# Altium PCB PCB1.PcbDoc (part 2 of 3)
Units mil, origin at the board's own origin, x right, y up, seen from the top; angles counter-clockwise.
Board outline 3898.53 x 2644.2 mil, 4 copper layers (Top Layer, Layer 1, Layer 2, Bottom Layer), stack 64.602 mil thick; 147 components, 160 nets, 823 pads, 446 vias.
Unrouted connection lines stored in the file: 1.
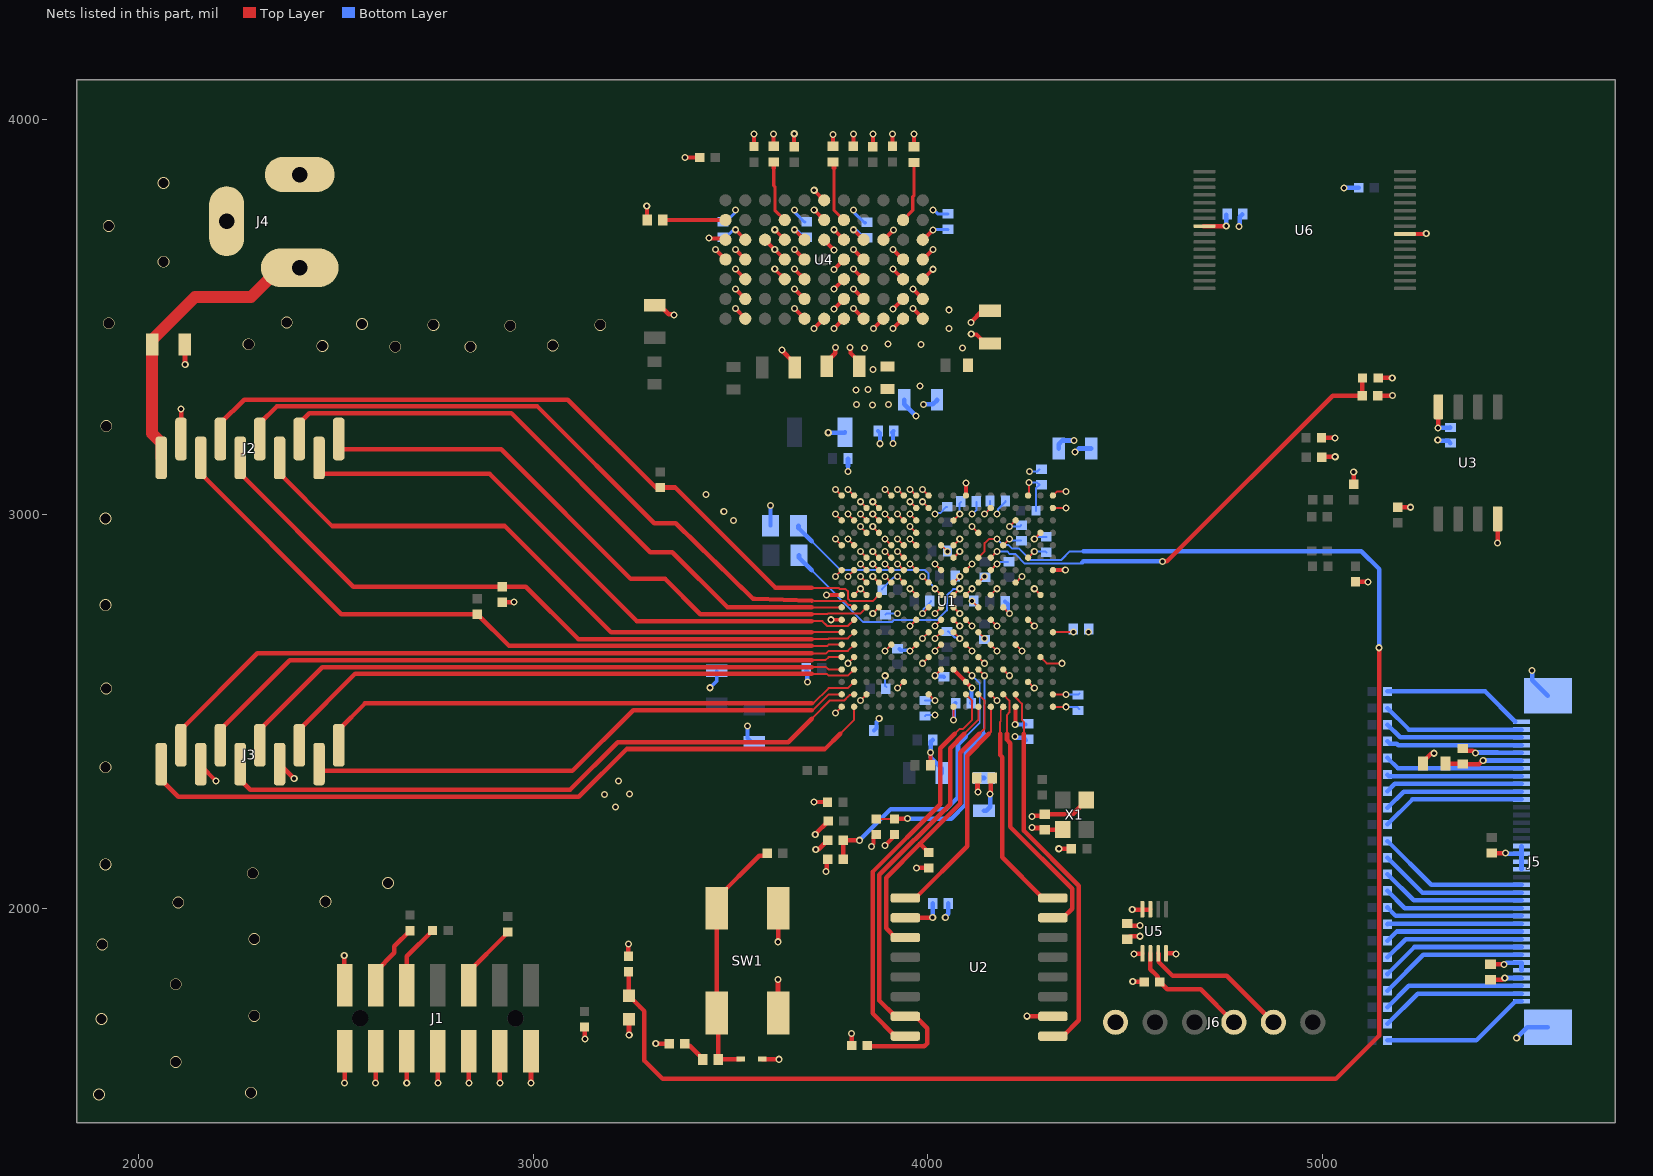
[diagram p4: the nets of this part, all layers, seen from the top]

## Via types
v1: diameter 18/10/10/18 (per signal layer), hole 10, Top Layer to Bottom Layer, tented top, 241 vias
v2: diameter 18/10/10/18 (per signal layer), hole 10, Top Layer to Bottom Layer, 173 vias
v3: diameter 30, hole 26, Top Layer to Bottom Layer, 32 vias

## Nets (pads, with @x,y where several pads share a name; then routed paths per layer and width w, separated by ;. In a path a pad name is that pad's centre, name@x,y a point inside that pad or via, vN(x,y) a via of type N, cw(c..) or ccw(c..) an arc to the next point about the centre after c; other vN are vias at no path point) (continued)
+3V1Reg: C22.2 R62.2 U4.J1 U4.K1 U4.K2 | length 164.6
  Top Layer w10: v1@3861.79,3470.97 U4.J1@3887.04,3496.21 ; v1@3911.79,3470.97 U4.K1@3937.04,3496.21 ; v1@3911.79,3520.97 U4.K2@3937.04,3546.21 ; v2(4109.96,3457.28) 4111.49,3455.75 4123.2,3455.75 4145.7,3433.25 C22.2@4157.51,3433.25
  other v1: 3861.68,3470.97 3911.68,3470.97 3911.68,3520.97
  other v2: 4087.39,3422.25 3982.29,3430.81 3899.39,3431.98 4053.91,3470.9 4053.13,3518.78
+3V3: C1.1 C2.1 C3.1 C6.1 C24.1 C31.1 C32.1 C33.1 C34.1 C35.1 C36.1 C37.1 C49.1 C50.1 C51.1 C52.1 C53.1 C54.1 C55.1 C60.1 C61.1 J1.2 J5.32 J5.33 R1.1 R2.1 R3.1 R4.1 R5.1 R6.1 R7.1 R8.1 R9.1 R13.2 R16.1 R21.1 R22.1 R23.1 R57.1 R61.1 R63.1 U1.A16 U1.B13 U1.C10 U1.D17 U1.E10 U1.E14 U1.G18 U1.H15 U1.L16 U1.P17 U1.R10 U1.R14 U1.T11 U1.U8 U1.U18 U1.V15 U2.2 U3.8 U5.7 U5.8 U6.8 X1.4 | length 2181.1
  Top Layer w5: U1.U8@4001.98,2544.01 v1(4017.73,2528.27) ; U1.E10@4064.98,2921.97 v1(4080.73,2937.71) ; U1.C10@4064.98,2984.96 v1(4080.73,3000.71) ; v1(4143.72,3000.71) U1.B13@4159.47,3016.45 ; U1.R14@4190.96,2607.01 v1(4206.71,2591.26) ; U1.E14@4190.96,2921.97 v1(4206.71,2937.71) ; v1(4221.35,2467.74) v1@4222.46,2468.85 ; U1.H15@4222.46,2827.48 v1(4238.21,2843.23) ; U1.L16@4253.95,2732.99 v1(4269.7,2717.24) ; U1.A16@4253.95,3047.95 4256.59,3050.59 v1(4256.59,3081.33) ; v1(4269.7,2937.71) U1.D17@4285.45,2953.46 ; U1.P17@4285.45,2638.5 4301.2,2622.75 v1(4340.37,2622.75) ; U1.U18@4316.95,2544.01 v1(4350.02,2544.01)
  Top Layer w10: v2(3711.64,2271.3) 3712.18,2270.76 3745.16,2270.76 R5.1@3745.7,2270.22 ; v2(3891.37,2160.65) 3915.2,2184.47 R21.1@3915.2,2188.74 ; U1.R10@4064.98,2607.01 U1.T11@4096.47,2575.51 v1(4112.22,2559.76) ; v1@4222.46,2468.85 U1.V15@4222.46,2512.52 ; U1.G18@4316.95,2858.98 v1(4348.3,2858.99)
  Top Layer w11.55: v2(2520.7,1882.08) 2520.7,1807.7 J1.2@2521.61,1806.79 ; R4.1@3240.99,1880.53 v2(3241.04,1911.4) v2(3241.04,1911.4) ; v2(3714.5,2189.21) 3714.5,2189.92 R6.1@3747.39,2222.82 ; v2(3742.13,2095.09) 3743.22,2096.17 3743.22,2123.23 R22.1@3745.83,2125.84 ; v2(3806.63,1684.71) 3806.79,1684.55 3806.79,1654.03 R3.1@3806.95,1653.88 ; U2.2@3942.95,1977.77 3943.22,1978.04 4012.01,1978.04 v2(4012.28,1978.31) ; v2@3971.6,2104.26 4001.47,2104.26 R2.1@4001.92,2103.81 ; C36.1@4123.81,2332.12 4125.71,2330.23 4125.71,2297.73 v2(4126.79,2296.64) ; v2(4263.64,2206.43) 4264.73,2205.34 4291.8,2205.34 C24.1@4296.22,2200.91 4341.54,2200.91 X1.4@4341.83,2201.2 ; v2(4331.82,2152.66) 4332.03,2152.86 4363.53,2152.86 R57.1@4363.74,2153.07 ; C60.1@4505.41,1963.02 4511.05,1957.38 4536.4,1957.38 v2(4537.54,1958.52) ; v2(4518.04,1998.26) 4562.85,1998.26 U5.7@4563.86,1999.27 ; U6.8@4698.6,3730.7 4698.7,3730.81 4756.24,3730.81 v2(4756.34,3730.91) ; R16.1@4998.32,3145.36 4998.79,3145.83 5031.98,3145.83 v2(5032.46,3146.31) ; v2(5079.35,3107.68) 5079.35,3077.01 R9.1@5079.67,3076.69 ; R8.1@5083.98,2829.37 5084.44,2828.92 5115.14,2828.92 v2(5115.6,2828.46) ; R23.1@5141.19,3346.04 5176.81,3346.04 v2(5176.99,3345.87) ; R7.1@5190.65,3018.51 5190.75,3018.41 5223.37,3018.41 v2(5223.47,3018.32) ; R63.1@5255.08,2368.3 5255.08,2373.22 5276.64,2394.78 v2(5282.91,2394.78) ; v2(5293.22,3219.41) 5293.66,3219.86 5293.66,3272.2 U3.8@5294.11,3272.65 ; C6.1@5425.84,1860.27 5426.26,1859.85 5459.53,1859.85 v2(5459.95,1859.43)
  Bottom Layer w5: C55.1@3992.8,2528.52 3993.06,2528.27 v1(4017.73,2528.27) ; v1(4080.73,3000.71) 4080.73,3028.25 C50.1@4084.21,3031.73 ; v1(4143.72,3000.71) 4157.35,3014.34 C32.1@4157.35,3033.99 ; v1(4206.71,2937.71) 4210.23,2937.71 4214.53,2933.41 C51.1@4236.46,2933.41 ; C37.1@4247.88,2467.74 C37.1@4248.24,2467.38 ; v1(4256.59,3081.33) 4276.43,3081.33 4282.9,3074.86 4273.94,3065.9 R13.2@4273.94,3009.01 ; v1(4269.7,2937.71) 4273.22,2937.71 4278.68,2943.18 C49.1@4300.1,2943.18 ; v1(4350.02,2544.01) 4382.39,2544.01 C54.1@4384.23,2545.86
  Bottom Layer w10: C61.1@3873.81,3211.32 3878.68,3206.46 v2(3878.68,3179.31) ; C52.1@4109.68,2521.61 4110.95,2522.88 4110.95,2558.49 v1(4112.22,2559.76) ; v1(4221.35,2467.74) C37.1@4247.88,2467.74
  Bottom Layer w11.55: v2(4012.28,1978.31) 4012.41,1978.44 4012.41,2013.74 C3.1@4012.55,2013.88 ; v2(4126.79,2296.64) 4126.79,2322.43 4136.38,2332.01 C35.1@4142.26,2332.01 ; C31.1@4331.42,3167.16 4331.42,3177.9 4341,3187.48 v2(4370.19,3187.48) ; v2@4756.65,3731.22 C1.1@4756.65,3747.52 ; C1.1@4756.65,3760.04 C1.1@4756.65,3747.52 ; C1.1@4756.96,3747.83 C1.1@4756.65,3747.52 ; v2(5054.59,3827.37) 5055.35,3828.13 R1.1@5092.14,3828.13 ; v2(5293.22,3219.41) 5293.7,3219.9 5324.03,3219.9 C2.1@5324.51,3220.38 ; v2(5459.95,1859.43) 5461.48,1859.43 5466.04,1863.99 5504.4,1863.99 J5.32@5504.66,1864.25 J5.33@5504.66,1844.57
  Bottom Layer w12: v2(3988.56,3279.16) 4012.41,3279.16 4023.16,3289.91 C34.1@4023.16,3290.91
  other v2: 3971.59,2104.25 4407.14,2702.57 3859.95,3277.02 3818.97,3278.33 3900.66,3278.33 3817.92,3315.89 3848.65,3316.42 3980.25,3325.61
+3V3Reg: C19.2 R61.2 U4.F1 U4.G1 U4.G2 | length 164.7
  Top Layer w10: v1@3711.79,3470.97 U4.F1@3737.04,3496.21 ; v1@3761.79,3470.97 U4.G1@3787.04,3496.21 ; v1@3761.79,3520.97 U4.G2@3787.04,3546.21 ; v2(3802.57,3423.41) 3804.1,3421.88 3804.1,3409.75 3826.35,3387.5 C19.2@3826.35,3375.69
  other v1: 3711.68,3470.97 3761.68,3470.97 3761.68,3520.97
  other v2: 3860.83,3366.97 3839.16,3421.48
+5: C12.1 C15.1 C18.1 C21.1 C59.1 J2.1 J4.1 R33.1 R34.1 U4.B3 U4.B4 U4.B5 U4.E3 U4.E4 U4.E5 U4.F6 U4.H3 U4.H4 U4.H5 U4.L3 U4.L4 U4.L5 | length 1433.9
  Top Layer w10: v1@3511.91,3621.58 U4.B3@3537.16,3596.33 ; v1@3511.91,3671.58 U4.B4@3537.16,3646.33 ; v1(3511.91,3721.69) 3511.91,3721.58 3537.16,3696.33 U4.B5@3537.16,3696.21 ; R34.1@3559.31,3932.5 3559.35,3932.54 3559.35,3964.05 v2(3559.4,3964.09) ; v1@3661.91,3621.58 U4.E3@3687.16,3596.33 ; v1@3661.91,3671.58 U4.E4@3687.16,3646.33 ; v1@3661.91,3721.58 U4.E5@3687.16,3696.33 ; v1@3711.91,3771.58 U4.F6@3737.16,3746.33 ; v1@3811.91,3621.58 U4.H3@3837.16,3596.33 ; v1@3811.91,3671.58 U4.H4@3837.16,3646.33 ; v1@3811.91,3721.58 U4.H5@3837.16,3696.33 ; R33.1@3910.49,3932.91 3910.57,3932.99 3910.57,3964.71 v2(3910.66,3964.8) ; U4.L3@3987.28,3596.21 v1@4012.52,3621.46 ; U4.L4@3987.28,3646.21 v1@4012.52,3671.46 ; U4.L5@3987.28,3696.21 v1@4012.52,3721.46
  Top Layer w30: J2.1@2056.78,3143.25 2056.78,3181.75 2033.7,3204.82 C59.1@2033.7,3430.51 2033.7,3442.32 2142.75,3551.37 2284.68,3551.37 2358.61,3625.3 J4.1@2407.83,3625.3
  Bottom Layer w8: C12.1@3485.11,3701.29 3487.08,3701.29 3505.57,3719.78 3510,3719.78 v1(3511.91,3721.69) ; v1(3661.91,3721.69) 3663.82,3719.78 3668.96,3719.78 3686.86,3701.89 C15.1@3688.83,3701.89 ; v1(3811.91,3721.69) 3813.82,3719.78 3819.7,3719.78 3839.4,3700.09 C18.1@3841.37,3700.09 ; v1(4012.64,3721.46) 4013.19,3722.01 4050.25,3722.01 C21.1@4050.81,3722.57
  other v1: 4012.64,3621.46 3511.91,3621.69 3661.91,3621.69 3811.91,3621.69 4012.64,3671.46 3511.91,3671.69 3661.91,3671.69 3811.91,3671.69 3711.91,3771.69
B_UART0_RX: J6.4 R68.1 U5.2 | length 312.3
  Top Layer w11.55: U5.2@4563.86,1887.27 4563.86,1847.37 4579.55,1831.68 4579.55,1831.53 4582.41,1828.66 4582.41,1820.41 4606.58,1796.24 4691.51,1796.24 4774.81,1712.95 J6.4@4775.62,1712.95
B_UART0_TX: J6.5 U5.3 | length 375.9
  Top Layer w11.55: U5.3@4583.86,1887.27 4585.02,1886.11 4585.02,1865.78 4620.19,1830.61 4757.95,1830.61 J6.5@4875.62,1712.95
BOLO_D0: J3.1 U1.V2 | length 1927.3
  Top Layer w5: 3777.46,2443.9 3813.01,2479.45 U1.V2@3813.01,2512.52
  Top Layer w11.55: J3.1@2056.78,2367.1 2056.78,2327.6 2099.77,2284.61 3115.41,2284.61 3236.35,2405.55 3739.11,2405.55 3777.46,2443.9
BOLO_D1: J3.2 U1.N2 | length 1835
  Top Layer w5: 3705.7,2647.84 3742.04,2647.84 3748.44,2654.25 3797.26,2654.25 U1.N2@3813.01,2670
  Top Layer w11.55: J3.2@2106.78,2415.1 2106.78,2454.6 2300.02,2647.84 3705.7,2647.84
BOLO_D2: J3.4 U1.P1 | length 1690.4
  Top Layer w5: 3705.7,2630.51 3740.45,2630.51 3748.44,2638.5 U1.P1@3781.51,2638.5
  Top Layer w11.55: J3.4@2206.78,2415.1 2206.78,2454.6 2382.68,2630.51 3705.7,2630.51
BOLO_D3: J3.5 U1.U2 | length 1706.6
  Top Layer w5: 3705.7,2482.5 3751.64,2528.44 3788.09,2528.44 3798.41,2538.76 3801.53,2541.88 3810.88,2541.88 U1.U2@3813.01,2544.01
  Top Layer w11.55: J3.5@2256.78,2367.1 2256.78,2327.6 2282.44,2301.94 3093.01,2301.94 3213.95,2422.88 3646.08,2422.88 3705.7,2482.5
BOLO_D4: J3.6 U1.R1 | length 1582.5
  Top Layer w5: 3705.7,2613.18 3742.27,2613.18 3748.44,2607.01 U1.R1@3781.51,2607.01
  Top Layer w11.55: J3.6@2306.78,2415.1 2306.78,2454.6 2465.35,2613.18 3705.7,2613.18
BOLO_D5: J3.8 U1.R2 | length 1512.7
  Top Layer w5: 3705.7,2595.85 3743.85,2595.85 3748.44,2591.26 3797.26,2591.26 U1.R2@3813.01,2607.01
  Top Layer w11.55: J3.8@2406.78,2415.1 2406.78,2454.6 2548.02,2595.85 3705.7,2595.85
BOLO_D6: J3.9 U1.U1 | length 1417.5
  Top Layer w5: 3705.7,2503.67 3708.1,2503.67 3748.44,2544.01 U1.U1@3781.51,2544.01
  Top Layer w11.55: J3.9@2456.78,2367.1 2456.78,2358.19 2465.03,2349.94 3099.08,2349.94 3252.81,2503.67 3705.7,2503.67
BOLO_D7: J3.10 U1.T2 | length 1395.8
  Top Layer w5: 3705.7,2521 3709.68,2521 3748.44,2559.76 3797.26,2559.76 U1.T2@3813.01,2575.51
  Top Layer w11.55: J3.10@2506.78,2415.1 2506.78,2454.6 2573.18,2521 3705.7,2521
BOLO_LSYNC: J2.6 U1.K2 | length 1770.4
  Top Layer w5: 3705.7,2781.82 3713.14,2780.14 3715.54,2780.14 3746.86,2780.14 3789.65,2780.14 3792,2777.79 3799.38,2770.41 3804.07,2770.41 3809.99,2764.49 U1.K2@3813.01,2764.49
  Top Layer w11.55: J2.6@2306.78,3191.25 2306.78,3230.75 2349.78,3273.74 3010.42,3273.74 3306.73,2977.43 3360.84,2977.43 3556.42,2787 3561.18,2786.83 3705.7,2781.82
BOLO_MCLK: J2.10 U1.K3 | length 1539.1
  Top Layer w5: 3705.7,2747.15 3744.95,2747.15 3746.7,2748.9 3828.92,2748.9 U1.K3@3844.5,2764.49
  Top Layer w11.55: J2.10@2506.78,3191.25 2506.78,3173.72 2515.03,3165.47 2918.18,3165.47 3247.14,2836.51 3334.03,2836.51 3423.39,2747.15 3705.7,2747.15
BOLO_PCLK: J2.8 U1.K1 | length 1628.6
  Top Layer w5: 3705.7,2764.49 3748.44,2764.49 U1.K1@3781.51,2764.49
  Top Layer w11.55: J2.8@2406.78,3191.25 2406.78,3230.75 2432.44,3256.41 2944.49,3256.41 3296.42,2904.48 3352.15,2904.48 3492.14,2764.49 3705.7,2764.49
BOLO_RESET: J2.5 R66.1 U1.M2 | length 1776.7
  Top Layer w5: 3705.7,2684.16 3746.86,2684.16 3748.44,2685.75 3797.26,2685.75 U1.M2@3813.01,2701.49
  Top Layer w11.55: J2.5@2256.78,3143.25 2256.78,3103.75 2543.41,2817.11 R66.1@2920.89,2817.11 2981.07,2817.11 3114.01,2684.16 3705.7,2684.16
BOLO_SCL: J2.4 R64.2 U1.J4 | length 1962.6
  Top Layer w5: 3705.7,2813.88 3774.22,2813.88 3776.47,2811.63 3790.93,2811.63 3797.08,2805.48 3797.08,2786.85 3797.82,2786.11 3803.52,2780.41 3860.43,2780.41 U1.J4@3876,2795.98
  Top Layer w11.55: J2.4@2206.78,3191.25 2206.78,3230.75 2267.11,3291.08 3087.33,3291.08 3310.1,3068.31 R64.2@3321.91,3068.31 3359.21,3068.31 3613.64,2813.88 3705.7,2813.88
BOLO_SDA: J2.3 R65.2 U1.N1 | length 1846.5
  Top Layer w5: 3705.7,2666.83 3745.27,2666.83 3748.44,2670 U1.N1@3781.51,2670
  Top Layer w11.55: J2.3@2156.78,3143.25 2156.78,3103.75 2513.37,2747.15 R65.2@2858.01,2747.15 2938.34,2666.83 3705.7,2666.83
BOLO_TRIG: J2.9 U1.L2 | length 1558.2
  Top Layer w5: 3705.7,2729.82 3732.75,2729.82 3745.33,2717.24 3797.26,2717.24 U1.L2@3813.01,2732.99
  Top Layer w11.55: J2.9@2456.78,3143.25 2456.78,3110.91 2465.03,3102.66 2889.23,3102.66 3262.07,2729.82 3705.7,2729.82
BOLO_VSYNC: J2.7 U1.M1 | length 1630.9
  Top Layer w5: 3705.7,2701.49 3748.44,2701.49 U1.M1@3781.51,2701.49
  Top Layer w11.55: J2.7@2356.78,3143.25 2356.78,3103.75 2489.77,2970.75 2927.68,2970.75 3196.94,2701.49 3705.7,2701.49
FLASH_C\S\: R3.2 U1.V12 U2.7 | length 1193.8
  Top Layer w5: 4092.42,2443.9 4127.97,2479.45 U1.V12@4127.97,2512.52
  Top Layer w11.55: R3.2@3846.32,1653.88 3848.43,1651.76 3991.26,1651.76 3998.48,1658.98 3998.48,1697.83 3968.54,1727.77 U2.7@3942.95,1727.77 3917.36,1727.77 3877.05,1768.08 3877.05,2086.67 4056.31,2265.94 4056.31,2407.79 4092.42,2443.9
FLASH_CLK: U1.V14 U2.16 | length 558.3
  Top Layer w5: 4183.27,2443.9 4183.27,2473.94 4184.7,2475.37 4184.7,2504.02 4190.96,2510.28 U1.V14@4190.96,2512.52
  Top Layer w11.55: 4183.27,2443.9 4183.27,2390.27 4188.39,2385.16 4188.39,2130.75 4291.38,2027.77 U2.16@4316.97,2027.77
FLASH_DQ0: U1.U14 U2.15 | length 678.7
  Top Layer w5: U1.U14@4190.96,2544.01 4206.71,2528.27 4206.71,2498.33 4200.61,2492.23 4200.61,2443.9
  Top Layer w11.55: 4200.61,2443.9 4200.61,2428.52 4209.1,2420.03 4209.1,2207.94 4365.53,2051.51 4365.53,2000.75 4342.56,1977.77 U2.15@4316.97,1977.77
FLASH_DQ1: U1.U11 U2.8 | length 1032
  Top Layer w5: 4067.91,2443.9 4080.57,2456.56 4089.34,2456.56 4112.22,2479.45 4112.22,2528.27 U1.U11@4096.47,2544.01
  Top Layer w11.55: U2.8@3942.95,1677.77 3917.36,1677.77 3859.72,1735.41 3859.72,2093.85 4031.74,2265.87 4031.74,2407.73 4067.91,2443.9
FLASH_DQ2: U1.U15 U2.9 | length 975
  Top Layer w5: U1.U15@4222.46,2544.01 4222.46,2536.01 4238.21,2520.26 4238.21,2479.45 4243.48,2474.17 4243.48,2443.9
  Top Layer w11.55: 4243.48,2443.9 4243.48,2198.07 4382.87,2058.69 4382.87,1718.08 4342.56,1677.77 U2.9@4316.97,1677.77
FLASH_DQ3: U1.V13 U2.1 | length 589.4
  Top Layer w5: 4154.68,2443.9 4159.47,2448.68 4159.47,2479.45 U1.V13@4159.47,2512.52
  Top Layer w11.55: U2.1@3942.95,2027.77 3968.54,2027.77 4099.5,2158.73 4099.5,2388.72 4154.68,2443.9
FLASH_R\S\T\: R2.2 U1.U12 U2.3 | length 792.2
  Top Layer w5: U1.U12@4127.97,2544.01 4143.72,2528.27 4143.72,2457.45 4130.17,2443.9
  Top Layer w11.55: U2.3@3942.95,1927.77 3917.36,1927.77 3894.38,1950.75 3894.38,2079.5 3979.92,2165.04 ; R2.2@4001.92,2143.18 3980.06,2165.04 3979.92,2165.04 ; 4130.17,2443.9 4082.17,2395.9 4082.17,2267.28 3979.92,2165.04
GND: C1.2 C2.2 C3.2 C4.2 C5.2 C6.2 C8.2 C9.2 C10.2 C11.2 C12.2 C13.1 C14.1 C15.2 C16.1 C17.1 C18.2 C19.1 C20.1 C21.2 C22.1 C23.1 C24.2 C25.2 C26.2 C27.2 C28.2 C29.2 C30.2 C31.2 C32.2 C33.2 C34.2 C35.2 C36.2 C37.2 C38.2 C39.2 C40.2 C41.2 C42.2 C43.2 C44.2 C45.2 C46.2 C47.2 C48.2 C49.2 C50.2 C51.2 C52.2 C53.2 C54.2 C55.2 C56.2 C57.2 C58.2 C59.2 C60.2 C61.2 D1.1 D2.A FB2.2 J1.1 J1.3 J1.5 J1.7 J1.9 J1.11 J1.13 J2.2 J3.3 J3.7 J4.2 J4.3 J5.5 J5.17 J5.18 J5.19 J5.20 J5.34 J5.S1 J5.S2 J6.1 R20.1 R25.2 R26.2 R27.2 R28.1 R29.1 R30.1 R31.1 R32.1 R66.2 R67.2 R68.2 SW1.3 SW1.4 U1.A1 U1.A2 U1.A5 U1.A6 U1.A7 U1.A8 U1.A11 U1.A18 U1.B3 U1.B4 U1.B7 U1.B8 U1.B18 U1.C1 U1.C2 U1.C3 U1.C4 U1.C5 U1.C6 U1.C7 U1.C15 U1.D3 U1.D4 U1.D7 U1.D12 U1.E1 U1.E2 U1.E5 U1.E6 U1.E7 U1.E9 U1.F3 U1.F4 U1.F5 U1.F6 U1.F10 U1.F16 U1.G1 U1.G2 U1.G3 U1.G4 U1.G5 U1.G6 U1.G7 U1.G9 U1.G11 U1.G13 U1.H3 U1.H4 U1.H5 U1.H6 U1.H8 U1.H10 U1.H12 U1.J1 U1.J2 U1.J3 U1.J7 U1.J11 U1.J13 U1.J17 U1.K4 U1.K8 U1.K9 U1.K10 U1.K12 U1.K14 U1.L1 U1.L7 U1.L9 U1.L10 U1.L11 U1.L13 U1.M8 U1.M9 U1.M10 U1.M12 U1.M18 U1.N5 U1.N7 U1.N9 U1.N11 U1.N13 U1.N15 U1.P2 U1.P8 U1.P12 U1.R9 U1.T6 U1.T16 U1.U3 U1.U13 U1.V1 U1.V10 U1.V18 U2.10 U3.4 U4.A4 U4.A5 U4.B1 U4.B2 U4.C5 U4.D3 U4.D4 U4.D5 U4.E1 U4.E2 U4.F5 U4.F7 U4.G3 U4.G4 U4.G5 U4.H1 U4.H2 U4.J5 U4.K3 U4.K4 U4.L1 U4.L2 U5.1 U5.4 U6.24 X1.2 | length 7381.3
  Top Layer w5: v1(3765.76,2496.77) U1.V1@3781.51,2512.52 ; v1(3765.76,2843.23) U1.G1@3781.51,2858.97 ; v1(3765.76,2937.71) U1.E1@3781.51,2921.97 ; v1(3765.76,3000.71) U1.C1@3781.51,2984.96 ; v1(3765.76,3063.7) U1.A1@3781.51,3047.95 ; v1(3797.26,2622.75) U1.P2@3813.01,2638.5 ; v1(3797.26,2843.23) U1.G2@3813.01,2858.97 ; v1(3797.26,2937.71) U1.E2@3813.01,2921.97 ; v1(3797.26,3000.71) U1.C2@3813.01,2984.96 ; v1(3797.26,3063.7) U1.A2@3813.01,3047.95 ; U1.J2@3813.01,2795.98 v1(3828.76,2811.73) U1.J3@3844.5,2795.98 ; v1(3828.76,2528.27) U1.U3@3844.5,2544.01 ; v1(3828.76,2843.23) U1.H3@3844.5,2827.48 ; v1(3828.76,2874.72) U1.G3@3844.5,2858.97 ; v1(3828.76,2906.22) U1.F3@3844.5,2890.47 ; v1(3828.76,2969.21) U1.D3@3844.5,2953.46 ; v1(3828.76,3000.71) U1.C3@3844.5,2984.96 ; v1(3828.76,3032.2) U1.B3@3844.5,3016.45 ; v1(3860.25,2748.74) U1.K4@3876,2764.49 ; v1(3860.25,2843.23) U1.H4@3876,2827.48 ; v1(3860.25,2874.72) U1.G4@3876,2858.97 ; v1(3860.25,2906.22) U1.F4@3876,2890.47 ; v1(3860.25,2969.21) U1.D4@3876,2953.46 ; v1(3860.25,3000.71) U1.C4@3876,2984.96 ; v1(3860.25,3032.2) U1.B4@3876,3016.45 ; v1(3891.75,2654.25) U1.N5@3907.5,2670 ; v1(3891.75,2843.23) U1.H5@3907.5,2827.48 ; v1(3891.75,2874.72) U1.G5@3907.5,2858.97 ; v1(3891.75,2906.22) U1.F5@3907.5,2890.47 ; v1(3891.75,2937.71) U1.E5@3907.5,2921.97 ; v1(3891.75,3000.71) U1.C5@3907.5,2984.96 ; v1(3891.75,3063.7) U1.A5@3907.5,3047.95 ; v1(3923.24,2559.76) U1.T6@3938.99,2575.51 ; v1(3923.24,2843.23) U1.H6@3938.99,2827.48 ; v1(3923.24,2874.72) U1.G6@3938.99,2858.97 ; v1(3923.24,2906.22) U1.F6@3938.99,2890.47 ; v1(3923.24,2937.71) U1.E6@3938.99,2921.97 ; v1(3923.24,3000.71) U1.C6@3938.99,2984.96 ; v1(3923.24,3063.7) U1.A6@3938.99,3047.95 ; v1(3954.74,2654.25) U1.N7@3970.49,2670 ; v1(3954.74,2717.24) U1.L7@3970.49,2732.99 ; v1(3954.74,2811.73) U1.J7@3970.49,2795.98 ; v1(3954.74,2874.72) U1.G7@3970.49,2858.97 ; v1(3954.74,2937.71) U1.E7@3970.49,2921.97 ; v1(3954.74,2969.21) U1.D7@3970.49,2953.46 ; v1(3954.74,3000.71) U1.C7@3970.49,2984.96 ; v1(3954.74,3032.2) U1.B7@3970.49,3016.45 ; v1(3954.74,3063.7) U1.A7@3970.49,3047.95 ; v1(3986.24,2622.75) U1.P8@4001.98,2638.5 ; v1(3986.24,2685.75) U1.M8@4001.98,2701.49 ; v1(3986.24,2748.74) U1.K8@4001.98,2764.49 ; v1(3986.24,2843.23) U1.H8@4001.98,2827.48 ; v1(3986.24,3032.2) U1.B8@4001.98,3016.45 ; v1(3986.24,3063.7) U1.A8@4001.98,3047.95 ; v1(4017.73,2591.26) U1.R9@4033.48,2607.01 ; v1(4017.73,2654.25) U1.N9@4033.48,2670 ; v1(4017.73,2685.75) U1.M9@4033.48,2701.49 ; v1(4017.73,2717.24) U1.L9@4033.48,2732.99 ; v1(4017.73,2748.74) U1.K9@4033.48,2764.49 ; v1(4017.73,2874.72) U1.G9@4033.48,2858.97 ; U1.E9@4033.48,2921.97 v1(4049.23,2906.22) ; v1(4064.98,2479.45) U1.V10@4064.98,2512.52 ; U1.M10@4064.98,2701.49 v1(4080.73,2685.75) ; U1.L10@4064.98,2732.99 v1(4080.73,2717.24) ; U1.K10@4064.98,2764.49 v1(4080.73,2748.74) ; U1.H10@4064.98,2827.48 v1(4080.73,2843.23) ; U1.F10@4064.98,2890.47 v1(4080.73,2906.22) ; U1.N11@4096.47,2670 v1(4112.22,2654.25) ; U1.L11@4096.47,2732.99 v1(4112.22,2717.24) ; U1.J11@4096.47,2795.98 v1(4112.22,2811.73) ; U1.G11@4096.47,2858.97 v1(4112.22,2874.72) ; v1(4112.22,2780.23) U1.K12@4127.97,2764.49 ; v1(4112.22,2969.21) U1.D12@4127.97,2953.46 ; U1.P12@4127.97,2638.5 v1(4143.72,2622.75) ; U1.M12@4127.97,2701.49 v1(4143.72,2685.75) ; U1.H12@4127.97,2827.48 v1(4143.72,2843.23) ; U1.U13@4159.47,2544.01 v1(4175.21,2528.27) ; U1.N13@4159.47,2670 v1(4175.21,2654.25) ; U1.L13@4159.47,2732.99 v1(4175.21,2717.24) ; U1.J13@4159.47,2795.98 v1(4175.21,2811.73) ; U1.G13@4159.47,2858.97 v1(4175.21,2874.72) ; U1.K14@4190.96,2764.49 v1(4206.71,2748.74) ; v1(4206.71,2969.21) U1.C15@4222.46,2984.96 ; U1.N15@4222.46,2670 v1(4238.21,2654.25) ; U1.T16@4253.95,2575.51 v1(4269.7,2559.76) ; U1.F16@4253.95,2890.47 v1(4269.7,2906.22) ; v1(4269.7,2811.73) U1.J17@4285.45,2795.98 ; U1.V18@4316.95,2512.52 v1(4350.02,2512.52) ; U1.M18@4316.95,2701.49 4317.81,2702.35 v1(4369.12,2702.35) ; U1.B18@4316.95,3016.45 v1(4350.02,3016.45) ; U1.A18@4316.95,3047.95 4327.03,3058.04 v1(4349.88,3058.04)
  Top Layer w10: v2(3287.4,3781.38) 3287.88,3780.89 3287.88,3747.3 C14.1@3288.36,3746.82 ; v2(3384.55,3905.23) 3384.84,3904.93 R29.1@3421.69,3904.93 ; v1(3445.35,3700.83) 3446.88,3699.3 3484.07,3699.3 U4.A5@3487.16,3696.21 ; v1@3461.91,3671.58 U4.A4@3487.16,3646.33 ; v1@3511.91,3521.58 U4.B1@3537.16,3496.33 ; v1@3511.91,3571.58 U4.B2@3537.16,3546.33 ; U4.C5@3587.16,3696.58 U4.C5@3587.16,3696.21 3587.28,3696.21 U4.D4@3637.16,3646.33 ; v2(3608.57,3964.82) 3608.92,3964.47 3608.92,3933.32 C17.1@3609.28,3932.97 ; v1@3611.91,3621.58 U4.D3@3637.16,3596.33 ; v1@3611.91,3721.33 3611.91,3721.58 U4.D5@3637.16,3696.33 ; R30.1@3660.98,3932.36 3660.98,3964.62 v2(3661.29,3964.93) ; v1@3661.91,3521.58 U4.E1@3687.16,3496.33 ; v1@3661.91,3571.58 U4.E2@3687.16,3546.33 ; v1@3711.91,3821.58 U4.F7@3737.16,3796.33 ; U4.F5@3737.16,3696.1 v1@3762.4,3670.85 ; v1(3743.41,2796.05) 3743.45,2796.02 U1.J1@3781.51,2795.98 ; v1(3754.44,2733.17) 3754.53,2733.08 3781.42,2733.08 U1.L1@3781.51,2732.99 ; v2(3759.24,3963.04) 3759.31,3962.97 3759.31,3932.97 C20.1@3759.38,3932.9 ; v1@3761.79,3570.97 U4.G3@3787.04,3596.21 ; v1@3761.79,3620.97 U4.G4@3787.04,3646.21 ; v1@3761.91,3721.58 U4.G5@3787.16,3696.33 ; R31.1@3811.01,3932.9 3811.14,3933.03 3811.14,3964.08 v2(3811.27,3964.21) ; v1@3811.91,3521.58 U4.H1@3837.16,3496.33 ; v1@3811.91,3571.58 U4.H2@3837.16,3546.33 ; v2(3856.74,2157.98) 3856.74,2160.15 3862.68,2166.09 3862.68,2181.93 R25.2@3869.49,2188.74 ; R32.1@3860.11,3932.02 3860.54,3932.45 3860.54,3964.08 v2(3860.97,3964.5) ; U4.J5@3887.28,3696.21 v1@3912.52,3721.46 ; v1@3911.91,3621.58 U4.K3@3937.16,3596.33 ; v1@3911.91,3671.58 U4.K4@3937.16,3646.33 ; v1@3961.91,3521.58 U4.L1@3987.16,3496.33 ; v1@3961.91,3571.58 U4.L2@3987.16,3546.33 ; v2(3964.74,3963.92) 3965,3963.66 3965,3931.9 C23.1@3965.26,3931.64 ; C9.2@4006.68,2364.18 v2(4006.67,2396.32) ; v1(4096.4,3079.54) 4096.47,3079.47 U1.A11@4096.47,3047.95 ; U6.24@5209.07,3710.89 5262.4,3710.89 v2(5263.15,3711.64) ; U1.J1@3781.51,2795.98 U1.J1@3781.51,2795.98
  Top Layer w11.55: J2.2@2106.78,3191.25 2107,3191.47 2107,3266.83 v2(2107.23,3267.05) ; C59.2@2116.38,3430.51 2116.98,3429.91 2116.98,3381.13 v2(2117.58,3380.53) ; J3.3@2156.78,2367.1 2156.78,2363.19 v2(2195.67,2324.3) ; J3.7@2356.78,2367.1 2392.76,2331.12 v2(2393.87,2331.12) ; v2(2521.55,1559.34) 2521.55,1639.01 J1.1@2521.61,1639.07 ; v2(2600.35,1559.4) J1.3@2600.35,1639.07 ; v2(2679.09,1559.4) J1.5@2679.09,1639.07 ; v2(2757.83,1559.4) J1.7@2757.83,1639.07 ; v2(2836.57,1559.4) J1.9@2836.57,1639.07 ; v2(2915.31,1559.4) J1.11@2915.31,1639.07 ; R66.2@2920.89,2777.74 2920.98,2777.83 2950.61,2777.83 v2(2950.7,2777.92) ; v2(2994.05,1559.4) J1.13@2994.05,1639.07 ; R20.1@3129.87,1700.76 3130.15,1700.48 3130.15,1671 v2(3130.43,1670.72) ; D1.1@3242.42,1720.72 3242.42,1681 v2(3242.98,1680.43) ; C13.1@3307.82,3530.55 3319.63,3530.55 3343.17,3507.01 3355.03,3507.01 v2(3356.11,3505.93) ; v2(3310.28,1659.03) 3310.64,1658.66 R28.1@3344.7,1658.66 ; D2.A@3580.67,1619.66 3580.93,1619.4 3622.34,1619.4 v2(3622.68,1619.06) ; v2(3620.1,1821.46) 3620.1,1737.25 SW1.3@3620.91,1736.44 ; v2(3620.51,1916.87) 3620.51,2001.79 SW1.4@3620.91,2002.19 ; v2(3629.89,3417.03) 3629.89,3415.76 3659.06,3386.59 C16.1@3659.06,3374.78 ; v2(3715.85,2150.56) 3716.93,2151.64 3723.47,2151.64 R26.2@3745.83,2174 ; C19.1@3743.68,3375.69 3743.68,3387.5 3764.98,3408.8 3764.98,3422.32 v2(3766.07,3423.41) ; v2(4109.18,3486.86) 4138.25,3515.93 C22.1@4157.51,3515.93 ; v2(4157.94,2291.58) 4159.03,2292.66 4159.03,2327.97 C36.2@4163.18,2332.12 ; v2(4251.55,1728.23) 4251.78,1728 4316.74,1728 U2.10@4316.97,1727.77 ; v2(4263.64,2234.68) 4264.73,2235.77 4291.71,2235.77 C24.2@4296.22,2240.28 4367.13,2240.28 4400.89,2274.04 X1.2@4400.89,2276.01 ; C60.2@4505.41,1923.65 4512.67,1930.92 v2(4537.31,1930.92) ; v2(4519.25,1816.48) 4520.11,1815.62 4547.83,1815.62 R68.2@4548.69,1814.77 ; v2(4522.21,1886.34) 4542.93,1886.34 U5.1@4543.86,1887.27 ; U5.4@4603.86,1887.27 4627.57,1887.27 v2(4629.03,1885.81) ; R67.2@4997.58,3194.07 4997.75,3193.9 5031.44,3193.9 v2(5031.61,3193.72) ; R27.2@5140.16,3301.14 5140.44,3301.43 5177.79,3301.43 v2(5178.08,3301.71) ; C4.2@5355.59,2406.69 5361.24,2401.04 5381.06,2401.04 5386.84,2395.27 v2(5388.37,2395.27) ; C6.2@5425.84,1820.9 5456.15,1820.9 5460.61,1825.36 v2(5462.15,1825.36) ; C5.2@5432.54,2141.82 5432.6,2141.77 5463.56,2141.77 v2(5463.62,2141.71) ; U3.4@5444.11,2988.79 5444.18,2988.72 5444.18,2927.65 v2(5444.26,2927.58)
  Bottom Layer w5: C11.2@3884.03,2809.19 3884.03,2811.16 3913.61,2840.74 3920.76,2840.74 v1(3923.24,2843.23) ; v1(3891.88,2591.15) 3891.88,2565.46 C56.2@3894.53,2562.81 ; C58.2@3892.31,2745.86 3895.16,2748.71 v1(3923.31,2748.71) ; v1(3986.24,2748.74) 3988.72,2751.23 3988.72,2760.12 4007.63,2779.03 C44.2@4007.63,2780.99 ; C55.2@3992.8,2489.15 3994.84,2491.19 v1(4018.1,2491.19) ; v1(4017.73,3000.71) 4020.22,3003.19 4031.04,3003.19 4047.1,3019.25 C43.2@4049.07,3019.25 ; C45.2@4050.57,2703.18 4052.54,2703.18 4067.49,2688.23 4078.24,2688.23 v1(4080.73,2685.75) ; v1(4112.22,3000.71) 4123.58,3012.06 C50.2@4123.58,3031.73 ; v1(4175.21,2874.72) 4178.73,2874.72 4183.15,2879.14 C48.2@4202.92,2879.14 ; v1(4175.21,3000.71) 4177.7,3003.19 4177.7,3013.01 4196.72,3032.02 C32.2@4196.72,3033.99 ; v1(4206.71,2969.21) 4232.89,2969.21 C51.2@4236.46,2972.78 ; v1(4257.15,3109.16) 4277.83,3109.16 C33.2@4282.9,3114.23 ; v1(4269.7,2906.22) 4297.69,2906.22 C49.2@4300.1,2903.81 ; v1(4350.02,2512.52) 4378.21,2512.52 C54.2@4384.23,2506.49
  Bottom Layer w8: C12.2@3485.11,3740.66 3487.08,3740.66 3510,3763.57 3510,3769.66 v1(3511.91,3771.58) ; v1(3661.91,3771.58) 3663.82,3769.66 3663.82,3764.29 3686.86,3741.26 C15.2@3688.83,3741.26 ; v1(3811.91,3771.58) 3813.82,3769.66 3813.82,3765.03 3839.4,3739.46 C18.2@3841.37,3739.46 ; v1(4012.52,3771.46) 4015.23,3771.46 4024.75,3761.94 C21.2@4050.81,3761.94
  Bottom Layer w10: v2(3448.16,2560.7) 3464.88,2577.41 C27.2@3464.88,2603.58 ; v2(3542.66,2463.68) 3542.66,2433.91 3553.41,2423.17 C38.2@3559.77,2423.17 ; v2(3600.8,3022.26) 3600.8,2972 FB2.2@3601.22,2971.58 ; C8.2@3788.9,3207.18 C8.2@3790.18,3208.46 ; v1(3797.39,3109.15) 3797.47,3109.22 3797.47,3122.22 ; C39.2@3863,2452.1 3869.81,2458.91 3869.81,2473.79 3876.67,2480.66 v1(3876.67,2482.82) ; v2(3911.2,3179.7) 3911.2,3205.57 3909.32,3207.46 C61.2@3913.18,3211.32 ; C57.2@3927.53,2658.77 3930.51,2655.78 3953.21,2655.78 v1(3954.74,2654.25) ; v1(4017.73,2591.26) 4019.15,2589.84 4039.73,2589.84 C41.2@4041.15,2588.42 ; v1(4064.98,2479.45) 4066.51,2480.98 4066.51,2517.8 C52.2@4070.31,2521.61 ; C29.2@4195.98,2779.51 4202.79,2772.7 4202.79,2754.82 4206.71,2750.9 v1(4206.71,2748.74)
  Bottom Layer w11.55: C40.2@3691.32,2603.93 3694.1,2601.15 3694.1,2576.77 v2(3695.19,2575.68) ; v2(3747.51,3207.18) C8.2@3788.9,3207.18 ; 3797.47,3122.22 C26.2@3797.47,3141.48 ; C34.2@3940.49,3290.91 3940.49,3279.09 3969.45,3250.13 v2(3969.45,3250) ; C10.2@4012.04,2428.26 4007.5,2423.72 4007.5,2400.09 4006.67,2399.26 v2(4006.67,2396.32) 4007.76,2395.23 4007.76,2383.72 4035.27,2356.2 C25.2@4035.27,2344.39 ; v2(4044.1,1978.34) 4044.1,1979.87 4051.92,1987.69 C3.2@4051.92,2013.88 ; C35.2@4142.26,2249.33 4148.36,2249.33 4157.94,2258.91 v2(4157.94,2291.58) ; v2(4220.77,2436.87) 4222.31,2436.87 4225.52,2433.66 4242.59,2433.66 C37.2@4248.24,2428.01 ; v2(4373.09,3158.04) 4373.81,3158.04 4382.93,3167.16 C31.2@4414.09,3167.16 ; v2(4788.83,3729.9) 4788.83,3731.43 4790.69,3733.29 4790.69,3754.71 C1.2@4796.33,3760.35 ; v2(5292.41,3188.24) 5293.95,3188.24 5295.53,3186.66 5318.87,3186.66 C2.2@5324.51,3181.01 ; v2(5388.37,2395.27) 5389.9,2395.27 5391.35,2396.71 5443.74,2396.71 5444.7,2395.75 J5.5@5504.66,2395.75 ; v2(5462.15,1825.36) 5462.39,1825.12 5504.42,1825.12 J5.34@5504.66,1824.88 ; v2(5463.62,2141.71) 5465.15,2141.71 5466.76,2140.1 5504.4,2140.1 J5.18@5504.66,2139.84 ; v2(5492.52,1673.3) 5519.3,1700.08 J5.S2@5571.59,1700.08 ; J5.20@5504.66,2100.47 J5.19@5504.66,2120.16 J5.18@5504.66,2139.84 ; J5.17@5504.66,2159.53 J5.18@5504.66,2139.84 ; v2(5531.66,2604.27) 5531.66,2579.35 5570.77,2540.24 J5.S1@5571.59,2540.24
  other v1: 3511.91,3521.69 3661.91,3521.69 3811.91,3521.69 3961.91,3521.69 3761.68,3570.97 3511.91,3571.69 3661.91,3571.69 3811.91,3571.69 3961.91,3571.69 3761.68,3620.97 3611.91,3621.69 3911.91,3621.69 3762.4,3670.73 3461.91,3671.69 3611.91,3671.69 3911.91,3671.69 3912.64,3721.46 3611.91,3721.69 3761.91,3721.69 3711.91,3821.69
  other v2: 3208.51,2258.52 3180.19,2289.79 3244.07,2291.02 3216.24,2324 3507.27,2984.32 3482.67,3007.63 3438,3051
  other v3: 1898.94,1529.94 2284.54,1534.04 2093.59,1612.07 1905.1,1720.89 2292.76,1729.1 2093.59,1809.18 1907.16,1909.79 2292.76,1924.16 2099.75,2016.56 2473.44,2018.61 2631.55,2065.84 2288.65,2090.48 1915.37,2113.06 1915.37,2359.46 1917.42,2558.62 1915.37,2770.11 1915.37,2989.81 1917.42,3223.88 2650.03,3425.1 2840.98,3425.1 2465.23,3427.15 3048.99,3428.55 2278.38,3431.26 2941.59,3478.48 2746.53,3480.54 3169.5,3480.54 2565.84,3482.59 1923.58,3484.64 2374.89,3486.7 2062.79,3640.69 1923.58,3731.04 2062.79,3839.86
LCD_CS: J5.7 R35.2 | length 350.7
  Bottom Layer w11.55: R35.2@5164.97,2382.86 5191.45,2356.38 J5.7@5504.66,2356.38
LCD_DB1: J5.1 R41.2 | length 355.9
  Bottom Layer w11.55: R41.2@5164.97,2551.36 5412.57,2551.36 J5.1@5489.18,2474.75
LCD_DB2: J5.2 R42.2 | length 362.2
  Bottom Layer w11.55: R42.2@5164.97,2509.23 5219.4,2454.8 J5.2@5504.66,2454.8
LCD_DB3: J5.3 R43.2 | length 352.9
  Bottom Layer w11.55: R43.2@5164.97,2467.11 5196.96,2435.12 J5.3@5504.66,2435.12
LCD_DB4: J5.4 R44.2 | length 343.7
  Bottom Layer w11.55: R44.2@5164.97,2424.98 5170.61,2419.34 5188.23,2419.34 5192.13,2415.43 J5.4@5504.66,2415.43
LCD_DB5: J5.22 R45.2 | length 385.7
  Bottom Layer w11.55: R45.2@5164.97,2172.24 5276.11,2061.1 J5.22@5504.66,2061.1
LCD_DB6: J5.35 R50.1 | length 362.1
  Bottom Layer w11.55: R50.1@5164.97,1751.01 5219.16,1805.2 J5.35@5504.66,1805.2
LCD_DB7: J5.36 R52.1 | length 371.4
  Bottom Layer w11.55: R52.1@5164.97,1708.88 5241.6,1785.51 J5.36@5504.66,1785.51
LCD_DB8: J5.37 R54.1 | length 380.7
  Bottom Layer w11.55: R54.1@5164.97,1666.76 5390.37,1666.76 5489.44,1765.83 J5.37@5504.66,1765.83
LCD_DB10: J5.23 R47.2 | length 376.4
  Bottom Layer w11.55: R47.2@5164.97,2130.12 5253.67,2041.42 J5.23@5504.66,2041.42
LCD_DB11: J5.24 R49.2 | length 367.1
  Bottom Layer w11.55: R49.2@5164.97,2087.99 5231.23,2021.73 J5.24@5504.66,2021.73
LCD_DB12: J5.25 R51.2 | length 357.8
  Bottom Layer w11.55: R51.2@5164.97,2045.87 5208.79,2002.05 J5.25@5504.66,2002.05
LCD_DB13: J5.26 R53.2 | length 348.6
  Bottom Layer w11.55: R53.2@5164.97,2003.75 5186.35,1982.36 J5.26@5504.66,1982.36
LCD_DB14: J5.27 R55.2 | length 340.1
  Bottom Layer w11.55: R55.2@5164.97,1961.62 5165.76,1962.42 5504.4,1962.42 J5.27@5504.66,1962.68
LCD_DB15: J5.28 R56.2 | length 349.4
  Bottom Layer w11.55: R56.2@5164.97,1919.5 5188.46,1942.99 J5.28@5504.66,1942.99
LCD_DB16: J5.29 R46.1 | length 358.7
  Bottom Layer w11.55: R46.1@5164.97,1877.38 5210.9,1923.31 J5.29@5504.66,1923.31
LCD_DB17: J5.30 R48.1 | length 368
  Bottom Layer w11.55: R48.1@5164.97,1835.25 5233.34,1903.62 J5.30@5504.66,1903.62
LCD_IM0: J5.11 R39.2 | length 365.9
  Bottom Layer w11.55: R39.2@5164.97,2214.37 5228.24,2277.64 J5.11@5504.66,2277.64
LCD_RD: J5.10 R38.2 | length 356.6
  Bottom Layer w11.55: R38.2@5164.97,2256.49 5205.8,2297.32 J5.10@5504.66,2297.32
LCD_RS: J5.8 R36.2 | length 341.4
  Bottom Layer w11.55: R36.2@5164.97,2340.74 5168.75,2336.95 5504.4,2336.95 J5.8@5504.66,2336.69
LCD_RST: J5.31 R40.2 | length 377.3
  Bottom Layer w11.55: R40.2@5164.97,1793.13 5255.78,1883.94 J5.31@5504.66,1883.94
LCD_WR: J5.9 R37.2 | length 347.3
  Bottom Layer w11.55: R37.2@5164.97,2298.61 5183.36,2317.01 J5.9@5504.66,2317.01
M0: R21.2 R25.1 U1.R12 | length 609
  Top Layer w5: R25.1@3869.49,2228.11 R21.2@3915.2,2228.11 R21.2@3915.7,2228.62 ; U1.R12@4127.97,2607.01 v1(4143.72,2591.26)
  Top Layer w11.55: R21.2@3915.7,2228.62 3948.1,2228.62 v2(3948.61,2229.13)
  Bottom Layer w5: 4141.99,2443.9 v1(4143.72,2591.26)
  Bottom Layer w11.55: v2(3948.61,2229.13) 4059.71,2229.13 4095.51,2264.93 4095.51,2397.09 4138.85,2440.43 4141.99,2443.9
M1: R22.2 R26.1 U1.R11 | length 745.5
  Top Layer w5: U1.R11@4096.47,2607.01 v1(4112.22,2591.26)
  Top Layer w11.55: R22.2@3785.2,2125.84 R26.1@3785.2,2174 3826.66,2174 v2(3826.8,2174.14)
  Bottom Layer w5: 4095.96,2436.29 4131.51,2471.84 4131.51,2571.97 v1(4112.22,2591.26)
  Bottom Layer w11.55: v2(3826.8,2174.14) 3906,2253.33 4046.16,2253.33 4076.29,2283.47 4076.29,2416.62 4095.96,2436.29
M2: R23.2 R27.1 U1.F13 | length 1182.3
  Top Layer w5: U1.F13@4159.47,2890.47 v1(4175.21,2906.22)
  Top Layer w11.55: v2(4594.68,2880.92) 4605.64,2880.92 5025.87,3301.14 R27.1@5100.79,3301.14 5101.3,3301.66 5101.3,3345.53 R23.2@5101.82,3346.04
  Bottom Layer w5: v1(4175.21,2906.22) 4200.68,2906.22 4207.68,2899.22 4222.22,2899.22 4246.06,2875.38 4387.93,2875.38 4391.92,2879.36
  Bottom Layer w11.55: 4391.92,2879.36 4393.47,2880.92 v2(4594.68,2880.92)
NetC4_1: C4.1 J5.6 R63.2 | length 196.9
  Top Layer w11.55: R63.2@5312.17,2368.3 5312.66,2367.81 5355.1,2367.81 C4.1@5355.59,2367.32 5396.86,2367.32 5406.08,2376.54 v2(5407.62,2376.54)
  Bottom Layer w11.55: v2(5407.62,2376.54) 5407.86,2376.3 5504.42,2376.3 J5.6@5504.66,2376.06
NetC7_1: C7.1 R28.2 | length 62.6
  Top Layer w11.55: R28.2@3384.07,1658.66 3389.71,1653.02 3396.69,1653.02 3428.98,1620.73 C7.1@3428.98,1618.77
NetC7_2: C7.2 D2.C R24.1 SW1.1 SW1.2 | length 641.9
  Top Layer w11.55: D2.C@3525.55,1619.66 3525.29,1619.4 3468.98,1619.4 C7.2@3468.35,1618.77 3468.35,1733.49 SW1.1@3465.4,1736.44 SW1.2@3465.4,2002.19 3465.4,2027.78 3572.91,2135.29 3586.97,2135.29 R24.1@3592.61,2140.93
NetC14_2: C14.2 U4.A6 | length 159.7
  Top Layer w10: C14.2@3327.73,3746.82 3486.55,3746.82 U4.A6@3487.16,3746.21
NetC17_2: C17.2 U4.D6 | length 158.9
  Top Layer w8: 3609.28,3877.27 3609.28,3833.55 3612.33,3830.5 3612.33,3771.04 U4.D6@3637.16,3746.21
  Top Layer w11.55: 3609.28,3877.27 C17.2@3609.28,3893.6
NetC20_2: C20.2 U4.G6 | length 158.8
  Top Layer w8: 3762.12,3877.27 3762.12,3771.25 U4.G6@3787.16,3746.21
  Top Layer w11.55: C20.2@3759.38,3893.53 3762.12,3890.79 3762.12,3877.27
NetC23_2: C23.2 U4.K6 | length 157.7
  Top Layer w8: U4.K6@3937.16,3746.21 3961.66,3770.71 3961.66,3805.36 3965.26,3808.96 C23.2@3965.26,3892.27
NetD1_2: D1.2 R4.2 U1.F12 | length 4448.8
  Top Layer w5: U1.F12@4127.97,2890.47 4143.72,2906.22 4143.72,2927.11 4154.27,2937.66 v1(4175.35,2937.66)
  Top Layer w11.55: R4.2@3240.99,1841.16 3241.7,1840.45 3241.7,1780.49 D1.2@3242.42,1779.77 3269.44,1752.75 3270.13,1752.75 3281.62,1741.26 3281.62,1615.65 3328.08,1569.19 5033.67,1569.19 5143.65,1679.17 v2(5143.65,2662.19)
  Bottom Layer w5: v1(4175.35,2937.66) 4190.99,2922.01 4204.99,2922.01 4212.75,2914.25 4230.79,2914.25 4260.03,2885.01 4338.65,2885.01 4360.1,2906.46 4394.46,2906.46
  Bottom Layer w11.55: 4394.46,2906.46 5098.86,2906.46 5143.65,2861.68 v2(5143.65,2662.19)
NetFB1_1: FB1.1 U1.J10 | length 560.3
  Top Layer w5: U1.J10@4064.98,2795.98 v1(4080.73,2811.73)
  Bottom Layer w5: 3705.7,2858.21 3836.57,2727.35 3908.87,2727.35 3914.52,2733.01 4024.2,2733.01 4048.08,2756.88 4048.08,2794.61 4064.12,2810.65 4079.64,2810.65 v1(4080.73,2811.73)
  Bottom Layer w11.55: FB1.1@3673.28,2896.54 3673.28,2890.63 3705.7,2858.21
NetFB2_1: FB2.1 U1.J9 | length 450.6
  Top Layer w5: v1(4017.73,2811.73) U1.J9@4033.48,2795.98
  Bottom Layer w5: 3705.7,2932.06 3778.84,2858.93 3992.74,2858.93 4001.94,2849.73 4001.94,2829.06 4005.89,2825.11 4017.73,2813.26 v1(4017.73,2811.73)
  Bottom Layer w11.55: FB2.1@3672.09,2971.58 3672.09,2965.67 3705.7,2932.06
NetJ1_4: J1.4 R17.2 | length 174.4
  Top Layer w11.55: J1.4@2600.35,1806.79 2600.35,1841.23 2647.75,1888.64 2647.75,1905.66 R17.2@2687.28,1945.19
NetJ1_6: J1.6 R18.2 | length 165.8
  Top Layer w11.55: J1.6@2679.09,1806.79 2679.09,1879.91 R18.2@2744.6,1945.43
NetJ1_10: J1.10 R19.2 | length 175.8
  Top Layer w11.55: J1.10@2836.57,1806.79 2836.57,1841.23 2929.53,1934.19 2929.53,1936.1 R19.2@2935.17,1941.75